# EAGLE board Z80_Video (EAGLE 5.10)
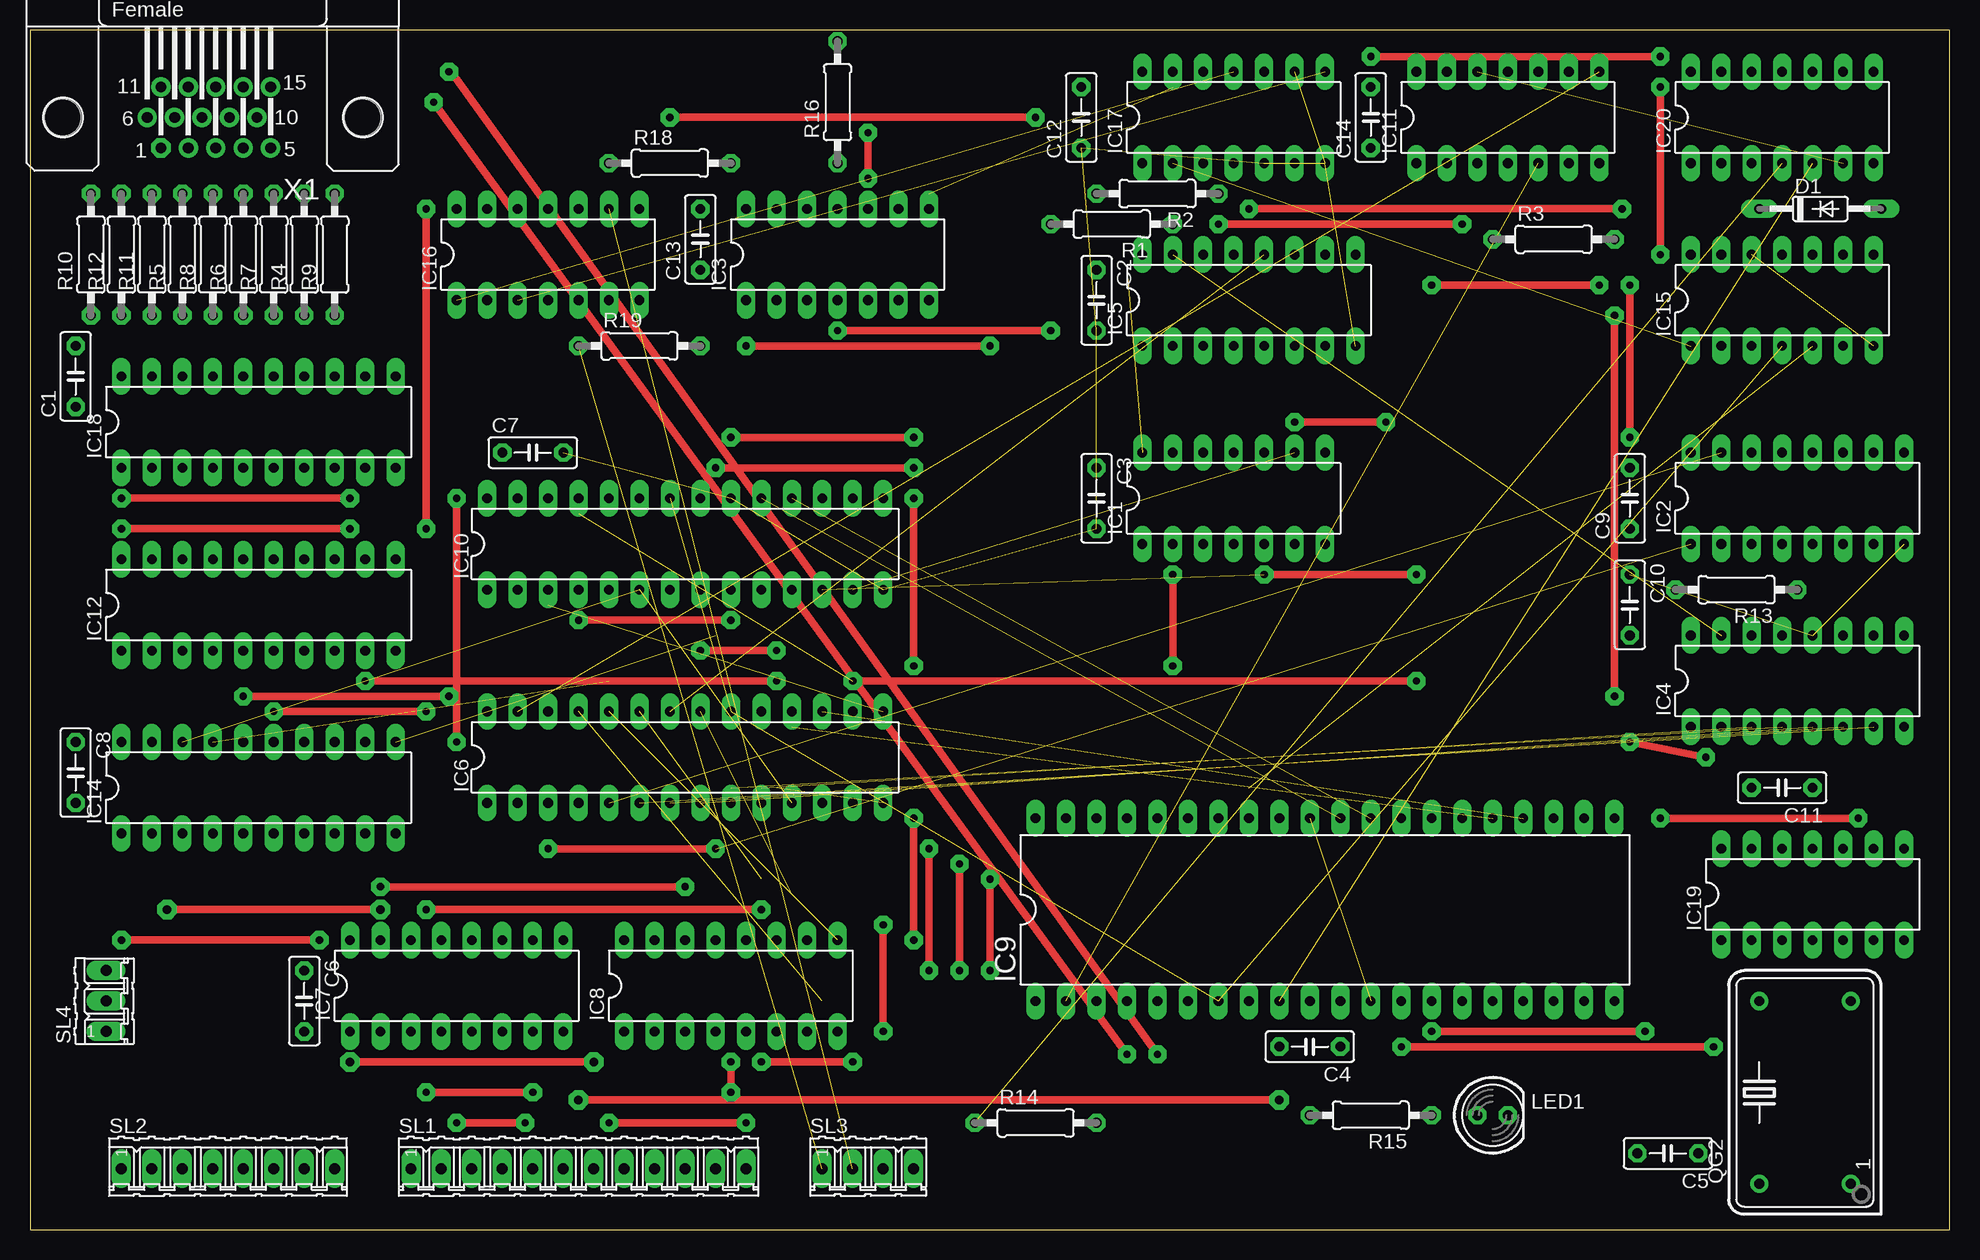
[diagram p0: board, top side]
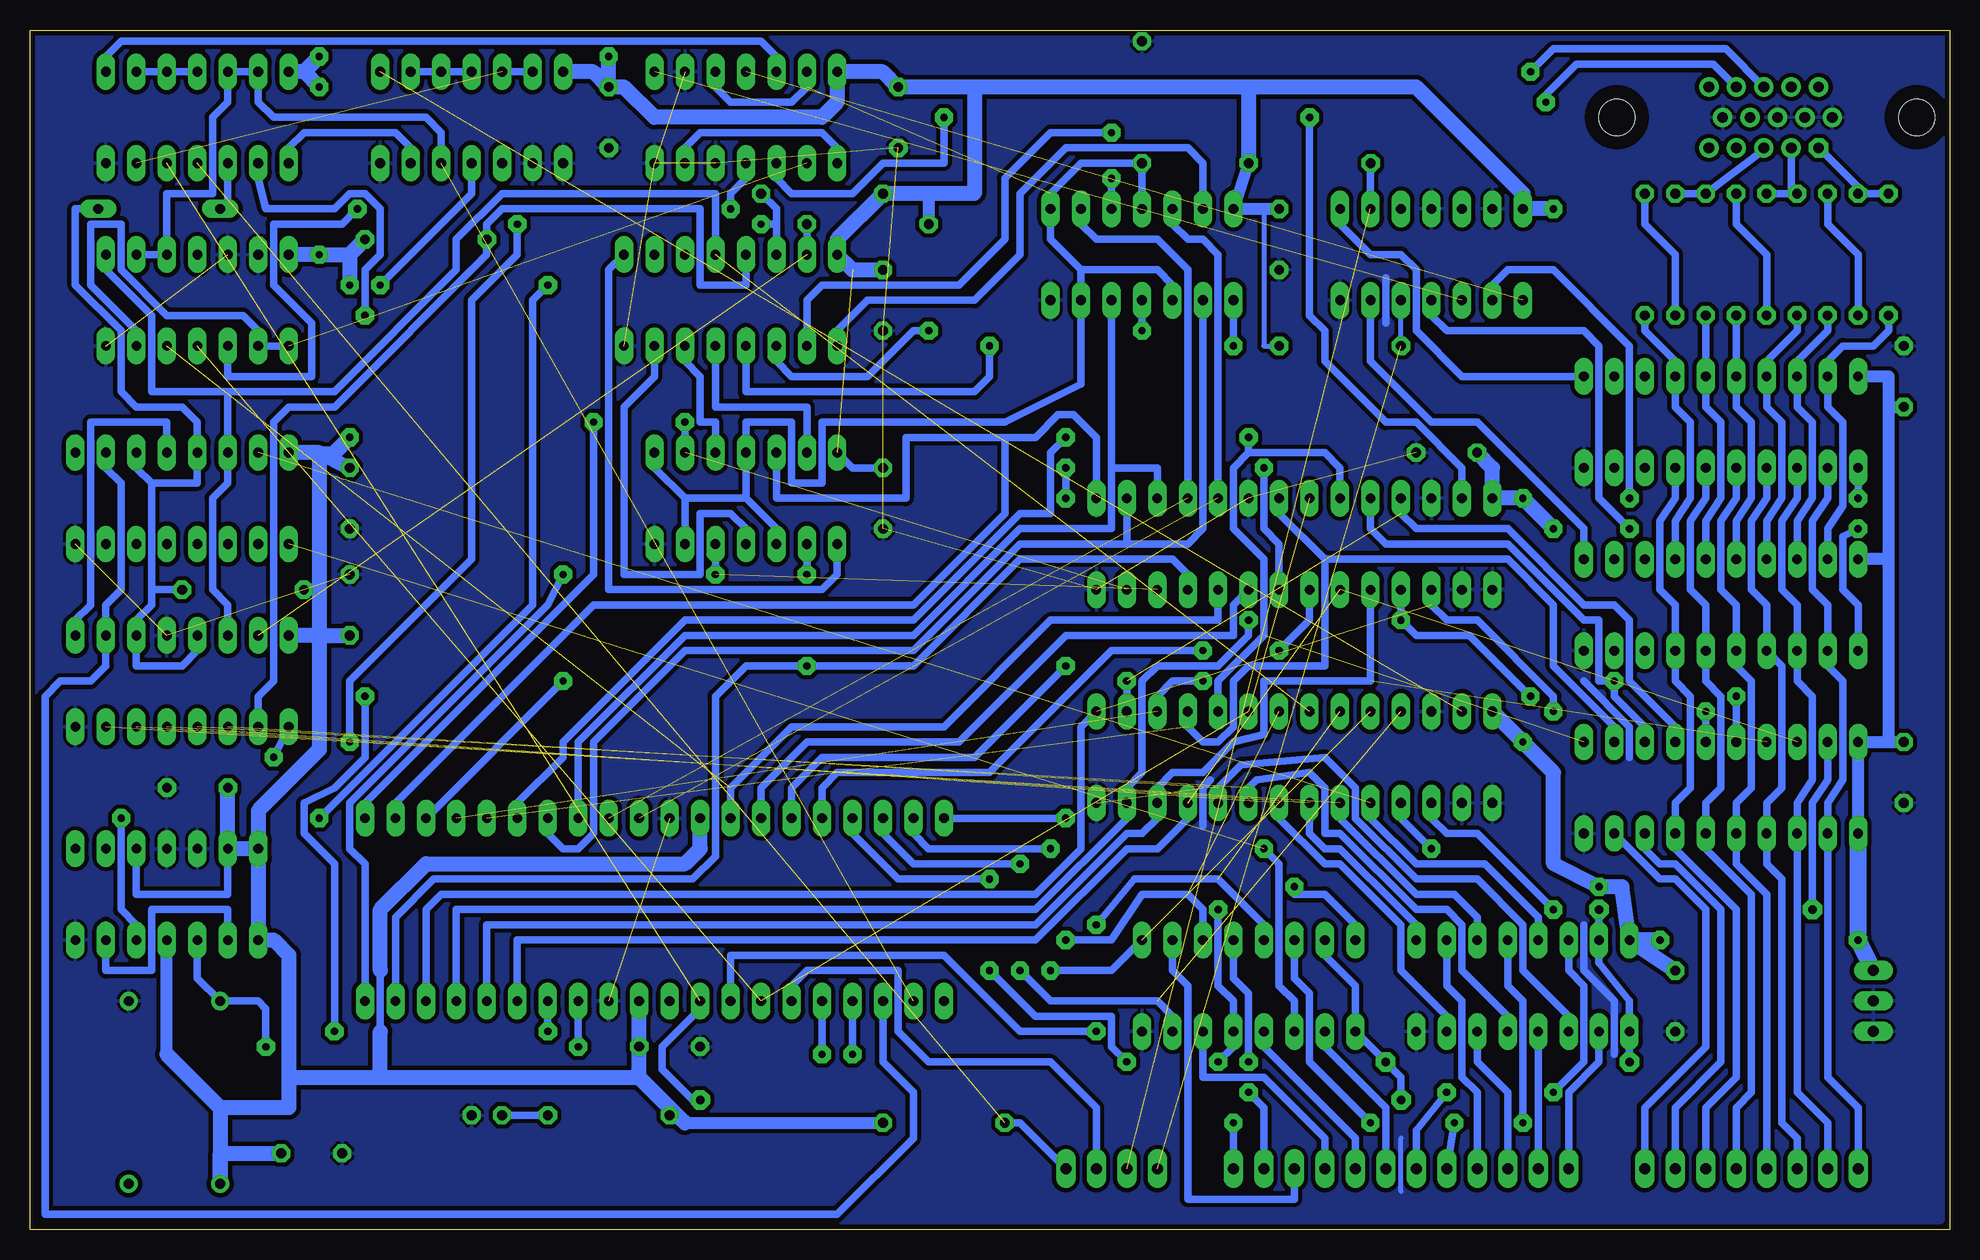
[diagram p1: board, bottom side, seen from below]

Size 160 x 100 mm. Coordinates in mm from the lower left corner, seen from the top.
Outline: 0,0 160,0 160,100 0,100 0,0
Copper layers (1*16): Top 0.035mm / dielectric 1.5mm / Bottom 0.035mm
Design rules "default *": minimum track width 10mil, minimum drill 24mil, track to track 14mil, track to pad 14mil, pad to pad 12mil, via to via 12mil, smd to smd 8mil, copper to edge 16mil, drill to drill 8mil, minimum pad ring 14mil, minimum via ring 18mil, stop-mask expansion 4mil, vias tented up to drill 0mil, thermal gap 10mil

## Footprints (pad centres in the part's own frame; a part is rotated, then mirrored left to right if it is on the bottom)
C050-025X075 = drill 0.813 octagon: 1 -2.54,0; 2 2.54,0
DO35-10 = drill 0.813 long: A 5.08,0; C -5.08,0
DIL14 = drill 0.813 long: 1 -7.62,-3.81; 2 -5.08,-3.81; 3 -2.54,-3.81; 4 0,-3.81; 5 2.54,-3.81; 6 5.08,-3.81; 7 7.62,-3.81; 8 7.62,3.81; 9 5.08,3.81; 10 2.54,3.81; 11 0,3.81; 12 -2.54,3.81; 13 -5.08,3.81; 14 -7.62,3.81
DIL16 = drill 0.813 long: 1 -8.89,-3.81; 2 -6.35,-3.81; 3 -3.81,-3.81; 4 -1.27,-3.81; 5 1.27,-3.81; 6 3.81,-3.81; 7 6.35,-3.81; 8 8.89,-3.81; 9 8.89,3.81; 10 6.35,3.81; 11 3.81,3.81; 12 1.27,3.81; 13 -1.27,3.81; 14 -3.81,3.81; 15 -6.35,3.81; 16 -8.89,3.81
DIL28-3 = drill 0.813 long: 1 -16.51,-3.81; 2 -13.97,-3.81; 3 -11.43,-3.81; 4 -8.89,-3.81; 5 -6.35,-3.81; 6 -3.81,-3.81; 7 -1.27,-3.81; 8 1.27,-3.81; 9 3.81,-3.81; 10 6.35,-3.81; 11 8.89,-3.81; 12 11.43,-3.81; 13 13.97,-3.81; 14 16.51,-3.81; 15 16.51,3.81; 16 13.97,3.81; 17 11.43,3.81; 18 8.89,3.81; 19 6.35,3.81; 20 3.81,3.81; 21 1.27,3.81; 22 -1.27,3.81; 23 -3.81,3.81; 24 -6.35,3.81; 25 -8.89,3.81; 26 -11.43,3.81; 27 -13.97,3.81; 28 -16.51,3.81
DIL40 = drill 0.813 long: 1 -24.13,-7.62; 2 -21.59,-7.62; 3 -19.05,-7.62; 4 -16.51,-7.62; 5 -13.97,-7.62; 6 -11.43,-7.62; 7 -8.89,-7.62; 8 -6.35,-7.62; 9 -3.81,-7.62; 10 -1.27,-7.62; 11 1.27,-7.62; 12 3.81,-7.62; 13 6.35,-7.62; 14 8.89,-7.62; 15 11.43,-7.62; 16 13.97,-7.62; 17 16.51,-7.62; 18 19.05,-7.62; 19 21.59,-7.62; 20 24.13,-7.62; 21 24.13,7.62; 22 21.59,7.62; 23 19.05,7.62; 24 16.51,7.62; 25 13.97,7.62; 26 11.43,7.62; 27 8.89,7.62; 28 6.35,7.62; 29 3.81,7.62; 30 1.27,7.62; 31 -1.27,7.62; 32 -3.81,7.62; 33 -6.35,7.62; 34 -8.89,7.62; 35 -11.43,7.62; 36 -13.97,7.62; 37 -16.51,7.62; 38 -19.05,7.62; 39 -21.59,7.62; 40 -24.13,7.62
DIL20 = drill 0.813 long: 1 -11.43,-3.81; 2 -8.89,-3.81; 3 -6.35,-3.81; 4 -3.81,-3.81; 5 -1.27,-3.81; 6 1.27,-3.81; 7 3.81,-3.81; 8 6.35,-3.81; 9 8.89,-3.81; 10 11.43,-3.81; 11 11.43,3.81; 12 8.89,3.81; 13 6.35,3.81; 14 3.81,3.81; 15 1.27,3.81; 16 -1.27,3.81; 17 -3.81,3.81; 18 -6.35,3.81; 19 -8.89,3.81; 20 -11.43,3.81
LED5MM = drill 0.813 octagon: A -1.27,0; K 1.27,0
DIL14S = drill 0.813 round: 1 -7.62,-3.81; 7 7.62,-3.81; 8 7.62,3.81; 14 -7.62,3.81
0207/10 = drill 0.813 octagon: 1 -5.08,0; 2 5.08,0
12P = drill 0.914 long: 1 -13.97,0; 2 -11.43,0; 3 -8.89,0; 4 -6.35,0; 5 -3.81,0; 6 -1.27,0; 7 1.27,0; 8 3.81,0; 9 6.35,0; 10 8.89,0; 11 11.43,0; 12 13.97,0
08P = drill 0.914 long: 1 -8.89,0; 2 -6.35,0; 3 -3.81,0; 4 -1.27,0; 5 1.27,0; 6 3.81,0; 7 6.35,0; 8 8.89,0
04P = drill 0.914 long: 1 -3.81,0; 2 -1.27,0; 3 1.27,0; 4 3.81,0
03P = drill 0.914 long: 1 -2.54,0; 2 0,0; 3 2.54,0
HDF15H = drill 0.9 octagon: 1 4.329,2.54 | drill 0.9 round: 2 2.043,2.54; 3 -0.243,2.54; 4 -2.529,2.54; 5 -4.815,2.54; 6 5.472,0; 7 3.186,0; 8 0.9,0; 9 -1.386,0; 10 -3.672,0; 11 4.329,-2.54; 12 2.043,-2.54; 13 -0.243,-2.54; 14 -2.529,-2.54; 15 -4.815,-2.54 | hole 3: -12.5,0; 12.5,0

## Placement (x,y rotation side)
C1  100n  [C050-025X075]  3.81,71.12 90 top
C2  100n  [C050-025X075]  88.9,77.47 270 top
C3  100n  [C050-025X075]  88.9,60.96 270 top
C4  100n  [C050-025X075]  106.68,15.24 180 top
C5  100n  [C050-025X075]  136.53,6.35 180 top
C6  100n  [C050-025X075]  22.86,19.05 270 top
C7  100n  [C050-025X075]  41.91,64.77 0 top
C8  100n  [C050-025X075]  3.81,38.1 270 top
C9  100n  [C050-025X075]  133.35,60.96 90 top
C10  100n  [C050-025X075]  133.35,52.07 270 top
C11  100n  [C050-025X075]  146.05,36.83 180 top
C12  100n  [C050-025X075]  87.63,92.71 90 top
C13  100n  [C050-025X075]  55.88,82.55 90 top
C14  100n  [C050-025X075]  111.76,92.71 90 top
D1  BAT43  [DO35-10]  149.22,85.09 0 top
IC1  74HC125N  [DIL14]  100.33,60.96 0 top
IC2  74HC590  [DIL16]  147.32,60.96 0 top
IC3  74HC125N  [DIL14]  67.31,81.28 0 top
IC4  74HC590  [DIL16]  147.32,45.72 0 top
IC5  74LS42N  [DIL16]  101.6,77.47 0 top
IC6  text ram  [DIL28-3]  54.61,39.37 0 top
IC7  74367N  [DIL16]  35.56,20.32 0 top
IC8  74367N  [DIL16]  58.42,20.32 0 top
IC9  PIC18F4455_40  [DIL40]  107.95,26.67 0 top
IC10  character ram  [DIL28-3]  54.61,57.15 0 top
IC11  74S08  [DIL14]  123.19,92.71 0 top
IC12  74HCT573N  [DIL20]  19.05,52.07 0 top
IC14  74LS245N  [DIL20]  19.05,36.83 0 top
IC15  74S00  [DIL14]  146.05,77.47 0 top
IC16  74F04N  [DIL14]  43.18,81.28 0 top
IC17  74LS86N  [DIL14]  100.33,92.71 0 top
IC18  74HCT573N  [DIL20]  19.05,67.31 0 top
IC19  74HC74  [DIL14]  148.59,27.94 0 top
IC20  7432N  [DIL14]  146.05,92.71 0 top
LED1  power  [LED5MM]  121.92,9.53 0 top
QG2  50 MHz  [DIL14S]  147.96,11.43 90 top
R1  4K7  [0207/10]  90.17,83.82 180 top
R2  4K7  [0207/10]  93.98,86.36 180 top
R3  4K7  [0207/10]  127,82.55 0 top
R4  500  [0207/10]  22.86,81.28 90 top
R5  500  [0207/10]  12.7,81.28 90 top
R6  500  [0207/10]  17.78,81.28 90 top
R7  500  [0207/10]  20.32,81.28 90 top
R8  500  [0207/10]  15.24,81.28 90 top
R9  500  [0207/10]  25.4,81.28 90 top
R10  500  [0207/10]  5.08,81.28 90 top
R11  500  [0207/10]  10.16,81.28 90 top
R12  500  [0207/10]  7.62,81.28 90 top
R13  330  [0207/10]  142.24,53.34 180 top
R14  4K7  [0207/10]  83.82,8.89 0 top
R15  560  [0207/10]  111.76,9.53 180 top
R16  680  [0207/10]  67.31,93.98 90 top
R18  4K7  [0207/10]  53.34,88.9 0 top
R19  4K7  [0207/10]  50.8,73.66 0 top
SL1  address bus  [12P]  45.72,5.08 0 top
SL2  data bus  [08P]  16.51,5.08 0 top
SL3  control bus  [04P]  69.85,5.08 0 top
SL4  power  [03P]  6.35,19.05 90 top
X1  vga  [HDF15H]  15.24,92.71 180 top

## Library data of the parts
C1-C14 = rcl
D1 = diode
IC1-IC5 IC7 IC8 IC11 IC12 IC14-IC20 = 74xx-us
IC6 IC10 = memory-hitachi
IC9 = microchip
LED1 = led
QG2 = crystal
R1-R16 R18 R19 = resistor
SL1-SL4 = con-amp-quick
X1 = con-subd

## Nets
/BG_PIXEL: IC16.2 IC18.1
/CLR_CNT: IC2.10 IC4.10 IC9.3
/EN_RAMACCESS: IC7.1 IC7.15 IC8.1 IC8.15 IC9.9 IC14.19 IC20.5
/FG_PIXEL: IC12.1 IC16.4
/H_SYNC: IC9.5 X1.13
/H_VISIBLE: IC2.14 IC4.14 IC5.12 IC6.22 IC15.8
/V_SYNC: IC9.4 X1.14
/VRAM_BUSY: IC9.6 SL3.3
/WE2: IC10.27 IC17.3
/WR_BGCOLOR: IC16.9 R18.1 SL3.2
/WR_FGCOLOR: IC16.5 R19.1 SL3.1
/WR_VRAM: IC20.4 R14.1 SL3.4
/WR_VRAM_OK: IC6.27 IC11.8
A0: IC4.3 IC6.10 IC7.3
A1: IC4.4 IC6.9 IC7.5
A2: IC4.5 IC6.8 IC7.7
A3: IC4.6 IC6.7 IC7.9
A4: IC4.7 IC6.6 IC7.11
A5: IC2.15 IC6.5 IC7.13
A6: IC2.1 IC6.4 IC8.3
A7: IC6.3 IC8.5 IC9.37
A8: IC6.25 IC8.7 IC9.38
A9: IC6.24 IC8.9 IC9.39
A10: IC6.21 IC8.11 IC9.40
A11: IC6.23 IC8.13 IC9.8
AC0: IC9.33 IC10.10 IC15.5
AC1: IC9.34 IC10.9
AC2: IC9.35 IC10.8
AC3: IC9.36 IC10.7
BG_PIXEL: IC16.1 IC17.11
CLKI: IC9.13 IC19.3 QG2.8
CNT_CLK: IC9.14 IC20.2
CPU_A0: IC7.2 SL1.1
CPU_A1: IC7.4 SL1.2
CPU_A2: IC7.6 SL1.3
CPU_A3: IC7.10 SL1.4
CPU_A4: IC7.12 SL1.5
CPU_A5: IC7.14 SL1.6
CPU_A6: IC8.2 SL1.7
CPU_A7: IC8.4 SL1.8
CPU_A8: IC8.6 SL1.9
CPU_A9: IC8.10 SL1.10
CPU_A10: IC8.12 SL1.11
CPU_A11: IC8.14 SL1.12
D0: IC12.2 IC14.2 IC18.2 SL2.1
D1: IC12.3 IC14.3 IC18.3 SL2.2
D2: IC12.4 IC14.4 IC18.4 SL2.3
D3: IC12.5 IC14.5 IC18.5 SL2.4
D4: IC12.6 IC14.6 IC18.6 SL2.5
D5: IC12.7 IC14.7 IC18.7 SL2.6
D6: IC14.8 SL2.7
D7: IC14.9 SL2.8
FG_PIXEL: IC16.3 IC17.8
GND: C1.2 C2.2 C3.2 C4.2 C5.2 C6.2 C7.2 C8.2 C9.1 C10.1 C11.1 C12.1 C13.1 C14.1 IC1.7 IC2.8 IC3.7 IC4.8 IC4.12 IC5.8 IC6.1 IC6.2 IC6.14 IC6.26 IC7.8 IC8.8 IC9.12 IC9.31 IC10.1 IC10.2 IC10.14 IC10.20 IC10.26 IC11.1 IC11.2 IC11.7 IC12.10 IC14.10 IC15.7 IC15.12 IC15.13 IC16.7 IC16.11 IC16.13 IC17.5 IC17.7 IC17.9 IC18.10 IC19.7 IC19.11 IC19.12 IC20.7 LED1.K QG2.7 R16.2 SL4.1 SL4.2 X1.6 X1.7 X1.8 X1.10
H_VISIBLE: IC9.2 IC11.5 IC15.9 IC15.10 IC20.12 IC20.13
H_VISIBLE_D1: IC20.9 IC20.10 IC20.11
H_VISIBLE_D2: IC17.12 IC20.8
I/O0: IC1.2 IC9.19 IC10.11
I/O1: IC1.5 IC9.20 IC10.12
I/O2: IC1.9 IC9.21 IC10.13
I/O3: IC1.12 IC9.22 IC10.15
I/O4: IC3.2 IC9.27 IC10.16
I/O5: IC3.5 IC9.28 IC10.17
I/O6: IC3.9 IC9.29 IC10.18
I/O7: IC3.12 IC9.30 IC10.19
N$1: R4.1 R9.2
N$2: R6.2 R8.1
N$3: R11.2 R12.1
N$4: IC15.3 IC17.4
N$5: D1.C IC20.3
N$6: LED1.A R15.1
N$7: IC11.9 IC11.10 IC11.11
N$8: IC11.12 IC11.13 IC20.6
N$14: IC19.2 IC19.6
N$15: IC17.1 IC17.6
N$16: D1.A IC2.11 IC2.13 IC4.11 IC4.13 R13.1
N$17: IC11.6 IC20.1
N$34: IC4.15 IC5.15 R1.1
N$35: IC4.1 IC5.14 R2.1
N$36: IC4.2 IC5.13 R3.1
N$39: IC2.12 IC4.9
N$58: IC15.1 IC15.2 IC15.6 IC17.2
O0: IC3.13 IC5.1
O1: IC3.10 IC5.2
O2: IC3.4 IC5.3
O3: IC3.1 IC5.4
O4: IC1.13 IC5.5
O5: IC1.10 IC5.6
O6: IC1.4 IC5.7
O7: IC1.1 IC5.9
PIXEL_CLK: IC11.4 IC19.5
PIXEL_OUT: IC1.3 IC1.6 IC1.8 IC1.11 IC3.3 IC3.6 IC3.8 IC3.11 IC17.10 IC17.13 R16.1
RC0: IC6.11 IC9.15 IC10.6 IC14.18
RC1: IC6.12 IC9.16 IC10.5 IC14.17
RC2: IC6.13 IC9.17 IC10.4 IC14.16
RC3: IC6.15 IC9.18 IC10.3 IC14.15
RC4: IC6.16 IC9.23 IC10.25 IC14.14
RC5: IC6.17 IC9.24 IC10.24 IC14.13
RC6: IC6.18 IC9.25 IC10.21 IC14.12
RC7: IC6.19 IC9.26 IC10.23 IC14.11
RGB0: IC12.19 IC18.19 R10.1
RGB1: IC12.18 IC18.18 R11.1
RGB2: IC12.17 IC18.17 R5.1
RGB3: IC12.16 IC18.16 R6.1
RGB4: IC12.15 IC18.15 R7.1
RGB5: IC12.14 IC18.14 R9.1
RGB_B: R4.2 R7.2 X1.3
RGB_G: R5.2 R8.2 X1.2
RGB_R: R10.2 R12.2 X1.1
VCC: C1.1 C2.1 C3.1 C4.1 C5.1 C6.1 C7.1 C8.1 C9.2 C10.2 C11.2 C12.2 C13.2 C14.2 IC1.14 IC2.16 IC3.14 IC4.16 IC5.16 IC6.28 IC7.16 IC8.16 IC9.11 IC9.32 IC10.28 IC11.14 IC12.20 IC14.1 IC14.20 IC15.14 IC16.14 IC17.14 IC18.20 IC19.1 IC19.4 IC19.10 IC19.13 IC19.14 IC20.14 QG2.14 R1.2 R2.2 R3.2 R13.2 R14.2 R15.2 R18.2 R19.2 SL4.3
WR_BGCOLOR: IC16.8 IC18.11
WR_CHARRAM: IC6.20 IC9.7 IC10.22 IC15.4
WR_FGCOLOR: IC12.11 IC16.6

## Tracks (layer width: path | path; a pad name or v marks a point on that pad's centre or on a via)
/BG_PIXEL  (via drill 0.6)
  Top 0.61: v7.62,60.96 v26.67,60.96
  Bottom 0.61: v7.62,60.96 IC18.1 | v26.67,60.96 26.67,73.66 33.02,80.01 36.83,80.01 38.1,78.74 IC16.2
/CLR_CNT
  Bottom 0.61: IC2.10 153.67,63.5 152.4,62.23 152.4,53.34 153.67,52.07 IC4.10 153.67,46.99 154.94,45.72 157.48,45.72 158.75,44.45 158.75,1.27 92.71,1.27 86.36,7.62 86.36,11.43 88.9,13.97 IC9.3
/EN_RAMACCESS  (via drill 0.7)  (1 unrouted)
  Top 0.61: v11.43,26.67 v29.21,26.67 | v45.72,10.79 v104.14,10.79 | v26.67,13.97 v46.99,13.97
  Bottom 0.61: IC8.15 52.07,22.86 49.53,20.32 IC8.1 v46.99,13.97 45.72,12.7 v45.72,10.79 | v29.21,26.67 IC7.15 29.21,22.23 26.67,19.05 IC7.1 v26.67,13.97 | v11.43,26.67 11.43,35.56 10.16,37.47 IC14.19 | v104.14,10.79 104.78,10.79 107.31,13.34 107.31,15.24 104.14,18.41 IC9.9
/FG_PIXEL  (via drill 0.6)
  Top 0.61: v7.62,58.42 v26.67,58.42
  Bottom 0.61: IC12.1 7.62,52.07 8.89,53.34 8.89,57.78 v7.62,58.42 | v26.67,58.42 29.21,60.96 29.21,73.66 30.48,74.93 41.91,74.93 43.18,76.2 IC16.4
/H_SYNC  (via drill 0.6)
  Top 0.61: v34.92,96.52 35.56,95.89 v93.98,14.61
  Bottom 0.61: X1.13 18.66,98.42 33.02,98.42 v34.92,96.52 | v93.98,14.61 IC9.5
/H_VISIBLE  (1 unrouted)
  Bottom 0.61: IC4.14 143.51,52.07 144.78,53.34 144.78,60.96 143.51,62.23 IC2.14 143.51,69.85 | IC15.8 153.67,80.01 149.86,76.2 149.86,69.85 143.51,69.85 | IC5.12 102.87,86.36 120.65,86.36 124.46,82.55 124.46,80.01 134.62,69.85 143.51,69.85
/V_SYNC  (via drill 0.6)
  Top 0.61: v91.44,14.61 v33.66,93.98
  Bottom 0.61: X1.14 19.67,97.16 31.11,97.16 33.66,94.61 v33.66,93.98 | v91.44,14.61 IC9.4
/VRAM_BUSY
  Bottom 0.61: IC9.6 96.52,20.32 95.25,21.59 87.63,21.59 87.63,16.51 85.09,13.97 74.93,13.97 71.12,10.16 SL3.3
/WE2  (via drill 0.6)
  Top 0.61: v53.34,92.71 v83.82,92.71
  Bottom 0.61: IC10.27 40.64,63.5 44.45,67.31 46.99,67.31 52.07,72.39 52.07,74.93 53.34,76.2 v53.34,92.71 | v83.82,92.71 83.82,88.9 88.9,88.9 91.44,86.36 96.52,86.36 97.79,87.63 IC17.3
/WR_BGCOLOR  (1 unrouted)
  Bottom 0.61: IC16.9 R18.1
/WR_FGCOLOR  (1 unrouted)
  Bottom 0.406: R19.1 IC16.5
/WR_VRAM  (1 unrouted)
  Bottom 0.61: R14.1 77.47,8.89 SL3.4
/WR_VRAM_OK  (1 unrouted)
A0  (1 unrouted)
  Bottom 0.61: IC7.3 31.75,17.78 35.56,21.59 35.56,25.4 39.37,29.21 44.45,29.21 49.53,34.29 49.53,36.83 52.07,39.37 59.05,38.73 60.96,36.83 IC6.10
A1  (1 unrouted)
  Bottom 0.61: IC7.5 36.83,17.78 40.64,21.59 40.64,25.4 41.91,26.67 44.45,26.67 50.8,33.02 52.07,33.02 52.07,36.83 53.34,38.1 57.78,37.47 58.42,36.83 IC6.9
A2  (1 unrouted)
  Bottom 0.61: IC7.7 41.91,17.78 45.72,21.59 45.72,25.4 50.8,30.48 52.07,30.48 55.88,34.29 IC6.8
A3  (1 unrouted)
  Bottom 0.61: IC7.9 44.45,25.4 45.72,26.67 50.8,31.75 52.07,31.75 53.34,33.02 IC6.7
A4  (1 unrouted)
  Bottom 0.61: IC7.11 39.37,26.04 41.27,27.94 44.45,27.94 50.8,34.29 IC6.6
A5  (1 unrouted)
  Bottom 0.61: IC7.13 34.29,26.04 38.73,30.48 44.45,30.48 48.26,34.29 IC6.5
A6  (via drill 0.6)  (1 unrouted)
  Top 0.61: v57.15,31.75 v43.18,31.75
  Bottom 0.61: IC8.3 54.61,19.05 55.88,20.32 55.88,30.48 v57.15,31.75 | v43.18,31.75 45.72,34.29 IC6.4
A7  (via drill 0.6)
  Top 0.61: v80.01,21.59 v80.01,29.21 | v60.96,13.97 v68.58,13.97 | v33.02,26.67 v60.96,26.67
  Bottom 0.61: IC9.37 91.44,33.02 87.63,29.21 v80.01,29.21 | v80.01,21.59 76.2,17.78 69.85,17.78 69.85,15.24 v68.58,13.97 | v60.96,13.97 59.69,15.24 IC8.5 59.69,19.05 60.96,20.32 v60.96,26.67 | v33.02,26.67 39.37,33.02 41.91,33.02 43.18,34.29 IC6.3
A8  (via drill 0.6)  (1 unrouted)
  Top 0.61: v77.47,21.59 v77.47,30.48
  Bottom 0.61: IC8.7 64.77,17.78 66.04,19.05 74.93,19.05 v77.47,21.59 | v77.47,30.48 86.36,30.48 88.9,33.02 IC9.38
A9  (via drill 0.6)  (1 unrouted)
  Top 0.61: v74.93,21.59 v74.93,31.75
  Bottom 0.61: IC9.39 86.36,33.02 85.09,31.75 v74.93,31.75 | v74.93,21.59 69.85,21.59 IC8.9
A10  (via drill 0.6)  (1 unrouted)
  Top 0.61: v73.66,24.13 v73.66,34.29
  Bottom 0.61: v73.66,34.29 IC9.40 | v73.66,24.13 69.85,24.13 67.31,27.94 63.5,27.94 62.23,26.67 IC8.11
A11  (via drill 0.6)  (1 unrouted)
  Top 0.61: v71.12,25.4 v71.12,16.51
  Bottom 0.61: IC8.13 57.15,25.4 60.96,29.21 67.94,29.21 v71.12,25.4 | v71.12,16.51 77.47,16.51 83.82,22.86 101.6,22.86 IC9.8
AC0  (1 unrouted)
  Bottom 0.61: IC10.10 60.96,50.8 74.93,50.8 83.82,41.91 96.52,41.91 101.6,36.83 IC9.33
AC1
  Bottom 0.61: IC10.9 59.69,52.07 59.69,49.53 73.66,49.53 82.55,40.64 95.25,40.64 99.06,36.83 IC9.34
AC2  (via drill 0.6)
  Top 0.61: v57.15,63.5 v73.66,63.5 | v73.66,60.96 v73.66,46.99
  Bottom 0.61: IC10.8 55.88,57.15 57.15,58.42 v57.15,63.5 | v73.66,63.5 v73.66,60.96 | v73.66,46.99 81.28,39.37 93.98,39.37 96.52,36.83 IC9.35
AC3  (via drill 0.6)
  Top 0.61: v55.88,48.26 v62.23,48.26
  Bottom 0.61: IC10.7 53.34,50.8 v55.88,48.26 | v62.23,48.26 69.85,48.26 80.01,38.1 92.71,38.1 93.98,36.83 IC9.36
BG_PIXEL  (1 unrouted)
CLKI  (via drill 0.6)
  Top 0.61: v114.3,15.24 v140.34,15.24
  Bottom 0.61: 146.05,22.86 IC19.3 146.05,20.95 QG2.8 140.97,19.05 140.34,18.41 v140.34,15.24 | v114.3,15.24 IC9.13
CNT_CLK  (via drill 0.6)
  Top 0.61: v132.08,44.45 v132.08,76.2 | v116.84,16.51 v134.62,16.51
  Bottom 0.61: IC20.2 140.97,87.63 140.34,85.09 134.62,85.09 133.35,86.36 132.08,86.36 130.81,85.09 130.81,81.28 132.08,80.01 v132.08,76.2 | v132.08,44.45 132.08,39.37 134.62,36.83 137.16,35.56 137.16,33.02 134.62,30.48 v134.62,16.51 | v116.84,16.51 IC9.14
CPU_A0
  Bottom 0.61: SL1.1 31.75,11.43 29.21,13.97 IC7.2
CPU_A1
  Bottom 0.61: SL1.2 IC7.4
CPU_A2
  Bottom 0.61: SL1.3 36.83,11.43 39.37,13.97 IC7.6
CPU_A3
  Bottom 0.61: SL1.4 39.37,11.43 40.64,12.7 40.64,19.05 41.91,20.32 IC7.10
CPU_A4  (via drill 0.6)
  Top 0.61: v35.56,8.89 v41.27,8.89
  Bottom 0.61: v35.56,8.89 35.56,19.05 36.83,20.32 IC7.12 | v41.27,8.89 SL1.5
CPU_A5  (via drill 0.6)
  Top 0.61: v33.02,11.43 v41.91,11.43
  Bottom 0.61: SL1.6 44.45,8.26 v41.91,11.43 | v33.02,11.43 30.48,13.97 30.48,20.32 31.75,21.59 IC7.14
CPU_A6
  Bottom 0.61: IC8.2 52.07,15.24 46.99,10.16 SL1.7
CPU_A7
  Bottom 0.61: SL1.8 49.53,7.62 54.61,12.7 55.88,13.97 57.15,15.24 IC8.4
CPU_A8
  Bottom 0.61: SL1.9 52.07,7.62 57.15,12.7 62.23,12.7 IC8.6
CPU_A9
  Bottom 0.61: SL1.10 54.61,2.54 63.5,2.54 63.5,20.32 64.77,21.59 IC8.10
CPU_A10  (via drill 0.6)
  Top 0.61: v58.42,11.43 v58.42,13.97
  Bottom 0.61: IC8.12 59.69,20.95 58.42,19.68 v58.42,13.97 | SL1.11 57.15,10.16 v58.42,11.43
CPU_A11  (via drill 0.6)
  Top 0.61: v48.26,8.89 v59.69,8.89
  Bottom 0.61: IC8.14 54.61,20.95 53.34,19.68 53.34,13.97 v48.26,8.89 | v59.69,8.89 SL1.12
D0
  Bottom 0.61: IC18.2 10.16,60.96 11.43,59.05 11.43,53.34 10.16,52.07 IC12.2 10.16,46.99 8.89,45.72 8.89,37.47 10.16,35.56 IC14.2 10.16,12.7 7.62,10.16 SL2.1
D1
  Bottom 0.61: IC18.3 12.7,60.96 13.97,59.05 13.97,53.34 12.7,52.07 IC12.3 12.7,45.72 11.43,44.45 11.43,37.47 12.7,35.56 IC14.3 12.7,11.43 10.16,8.89 SL2.2
D2
  Bottom 0.61: IC18.4 15.24,60.96 16.51,59.05 16.51,53.34 15.24,52.07 IC12.4 13.97,46.99 13.97,36.83 15.24,35.56 IC14.4 15.24,30.48 13.97,29.21 13.97,8.89 12.7,7.62 SL2.3
D3
  Bottom 0.61: IC18.5 17.78,60.96 19.05,59.05 19.05,53.34 17.78,52.07 IC12.5 17.78,46.99 16.51,45.72 16.51,36.83 17.78,35.56 IC14.5 17.78,30.48 15.24,27.94 SL2.4
D4
  Bottom 0.61: IC18.6 20.32,60.96 21.59,59.05 21.59,53.34 20.32,52.07 IC12.6 20.32,45.72 19.05,44.45 19.05,36.83 20.32,35.56 IC14.6 20.32,31.75 16.51,27.94 16.51,11.43 17.78,10.16 SL2.5
D5
  Bottom 0.61: IC18.7 22.86,60.96 24.13,59.05 24.13,53.34 22.86,52.07 IC12.7 22.86,45.72 21.59,44.45 21.59,36.83 22.86,35.56 IC14.7 22.86,31.75 17.78,26.67 17.78,12.7 20.32,10.16 SL2.6
D6
  Bottom 0.61: IC14.8 25.4,31.75 24.13,30.48 22.86,30.48 19.05,26.67 19.05,13.97 22.86,10.16 SL2.7
D7
  Bottom 0.61: SL2.8 25.4,10.16 20.32,15.24 20.32,26.67 22.86,29.21 24.13,29.21 IC14.9
FG_PIXEL  (1 unrouted)
GND  (14 unrouted)
  Bottom 0.406: 45.72,3.17 45.72,7.62
  Bottom 0.61: 62.23,33.66 62.23,36.83 61.59,37.47 | 26.67,39.37 26.67,41.91 30.48,45.72 | 46.99,75.56 46.99,79.38 | 30.48,25.4 30.48,21.59 27.94,19.05 27.94,14.61
  pour Bottom: 0,1.27 0,100.33 160.02,100.33 160.02,0 1.27,0
H_VISIBLE  (1 unrouted)
  Bottom 0.61: IC15.9 IC15.10 148.59,86.36 144.78,86.36 144.78,92.71 143.51,93.98 IC20.12 IC20.13 140.97,93.98 139.7,92.71 127,92.71 125.73,91.44 IC11.5
H_VISIBLE_D1
  Bottom 0.61: IC20.11 IC20.10 IC20.9
H_VISIBLE_D2
  Bottom 0.61: IC20.8 153.67,97.79 152.4,99.06 99.06,99.06 97.79,97.79 IC17.12
I/O0  (via drill 0.6)
  Top 0.61: v95.25,46.99 v95.25,54.61
  Bottom 0.61: IC10.11 63.5,54.61 64.77,55.88 77.47,55.88 86.36,46.99 v95.25,46.99 100.33,46.99 102.87,44.45 102.87,31.11 104.78,29.21 126.36,29.21 129.54,26.04 IC9.19 | v95.25,54.61 IC1.2
I/O1  (via drill 0.6)  (1 unrouted)
  Top 0.61: v115.57,54.61 v102.87,54.61
  Bottom 0.61: IC9.20 132.08,30.48 133.35,31.75 133.35,35.56 116.84,52.07 v115.57,54.61 | v102.87,54.61 IC1.5
I/O2  (via drill 0.6)  (1 unrouted)
  Top 0.61: v113.03,67.31 v105.41,67.31
  Bottom 0.61: IC9.21 132.08,35.56 113.03,54.61 v113.03,67.31 | v105.41,67.31 IC1.9
I/O3
  Bottom 0.61: 71.12,59.69 IC10.15 71.12,66.04 73.03,67.94 74.3,67.94 76.2,66.04 78.74,66.04 | 78.74,66.04 87,66.04 87,60.96 97.79,60.96 IC1.12 | IC9.22 129.54,35.56 113.03,52.07 86.36,52.07 78.74,59.69 78.74,66.04
I/O4
  Bottom 0.61: IC3.2 62.23,58.42 63.5,57.15 68.58,57.15 | IC10.16 68.58,58.42 68.58,57.15 | 68.58,57.15 77.47,57.15 86.36,48.26 105.41,48.26 113.03,40.64 113.03,33.02 114.3,31.75 115.57,31.75 116.84,33.02 IC9.27
I/O5
  Bottom 0.61: 69.85,63.5 IC3.5 | IC10.17 66.04,63.5 69.85,63.5 | 69.85,63.5 69.85,58.42 77.47,58.42 86.36,49.53 105.41,49.53 114.3,40.64 IC9.28
I/O6  (1 unrouted)
  Bottom 0.61: IC10.18 63.5,80.01 66.04,82.55 71.12,82.55 72.39,83.82 IC3.9
I/O7  (1 unrouted)
  Bottom 0.61: IC10.19 60.96,81.28 62.23,82.55 63.5,82.55 64.77,83.82 IC3.12
N$1
  Bottom 0.61: R9.2 25.4,83.82 22.86,81.28 R4.1
N$2
  Bottom 0.61: R8.1 15.24,81.28 17.78,83.82 R6.2
N$3
  Bottom 0.61: R11.2 10.16,83.82 7.62,81.28 R12.1
N$4  (via drill 0.6)
  Top 0.61: v101.6,85.09 v132.72,85.09
  Bottom 0.61: v101.6,85.09 101.6,86.36 100.33,87.63 IC17.4 | v132.72,85.09 133.99,83.82 139.7,83.82 139.7,78.74 136.53,75.56 136.53,71.12 143.51,71.12 IC15.3
N$5
  Bottom 0.61: D1.C 143.51,85.72 IC20.3
N$6
  Bottom 0.61: R15.1 LED1.A
N$7
  Bottom 0.61: IC11.11 IC11.10 IC11.9
N$8  (1 unrouted)
  Bottom 0.61: IC11.13 IC11.12
N$14
  Bottom 0.61: IC19.2 143.51,26.67 149.86,26.67 149.86,21.59 153.67,21.59 IC19.6 153.67,25.4
N$15
  Bottom 0.61: IC17.1 92.71,90.17 93.98,91.44 104.14,91.44 105.41,90.17 IC17.6
N$16
  Bottom 0.61: IC4.13 146.05,48.26 147.32,46.99 151.13,46.99 IC4.11 151.13,50.8 149.86,52.07 149.86,53.34 | 149.86,53.34 149.86,62.23 | 149.86,62.23 151.13,63.5 IC2.11 | 149.86,62.23 146.05,62.23 IC2.13 146.05,67.31 147.32,68.58 151.13,68.58 152.4,69.85 152.4,74.93 156.21,78.74 156.21,85.09 D1.A | 149.86,53.34 R13.1
N$17
  Bottom 0.61: IC11.6 128.27,90.17 129.54,91.44 137.16,91.44 138.43,90.17 IC20.1
N$34  (1 unrouted)
  Bottom 0.61: IC5.15 R1.1
N$35  (via drill 0.6)
  Top 0.61: v119.38,83.82 v99.06,83.82 | v133.35,40.64 v139.7,39.37
  Bottom 0.61: 97.79,83.82 97.79,85.09 R2.1 | 97.79,83.82 IC5.14 | v99.06,83.82 97.79,83.82 | v119.38,83.82 119.38,81.28 123.19,77.47 123.19,55.88 133.35,45.72 v133.35,40.64 | v139.7,39.37 IC4.1
N$36
  Bottom 0.61: IC4.2 140.97,44.45 139.7,45.72 139.7,67.31 138.43,68.58 134.62,68.58 121.92,81.28 R3.1 121.92,83.82 120.65,85.09 104.14,85.09 104.14,78.74 100.33,78.74 IC5.13
N$39
  Bottom 0.61: IC4.9 156.21,50.8 154.94,52.07 154.94,67.31 148.59,67.31 IC2.12
N$58  (1 unrouted)
  Bottom 0.61: IC15.1 IC15.2 140.97,74.93 142.24,76.2 148.59,76.2 152.4,80.01 152.4,83.82 154.94,83.82 154.94,78.74 151.13,74.93 IC15.6
O0
  Bottom 0.61: IC5.1 92.71,74.93 90.17,77.47 81.28,77.47 77.47,81.28 77.47,86.36 73.66,90.17 63.5,90.17 62.23,88.9 IC3.13
O1  (via drill 0.6)
  Top 0.61: v69.85,87.63 v69.85,91.44
  Bottom 0.61: IC5.2 95.25,77.47 93.98,78.74 82.55,78.74 78.74,82.55 78.74,87.63 74.93,91.44 v69.85,91.44 | IC3.10 v69.85,87.63
O2  (via drill 0.6)
  Top 0.61: v67.31,74.93 v85.09,74.93
  Bottom 0.61: v67.31,74.93 IC3.4 | v85.09,74.93 86.36,74.93 90.17,71.12 96.52,71.12 97.79,72.39 IC5.3
O3  (via drill 0.6)
  Top 0.61: v59.69,73.66 v80.01,73.66
  Bottom 0.61: 100.33,74.93 IC5.4 100.33,69.85 81.28,69.85 80.01,71.12 v80.01,73.66 | v59.69,73.66 IC3.1
O4
  Bottom 0.61: IC1.13 95.25,68.58 102.87,68.58 IC5.5
O5
  Bottom 0.61: IC1.10 102.87,67.31 104.14,67.31 104.14,71.12 105.41,72.39 IC5.6
O6
  Bottom 0.61: IC1.4 100.33,58.42 101.6,59.69 104.14,59.69 104.14,54.61 110.49,54.61 110.49,68.58 107.95,71.12 IC5.7
O7
  Bottom 0.61: IC1.1 92.71,54.61 93.98,53.34 111.76,53.34 111.76,80.01 IC5.9
PIXEL_CLK  (via drill 0.6)
  Top 0.61: v116.84,78.74 v130.81,78.74 | v135.89,34.29 v152.4,34.29
  Bottom 0.61: v130.81,78.74 123.19,86.36 IC11.4 | v116.84,78.74 118.11,77.47 118.11,52.07 v135.89,34.29 | v152.4,34.29 152.4,26.67 151.13,25.4 IC19.5
PIXEL_OUT  (1 unrouted)
  Bottom 0.61: IC3.3 64.77,78.74 66.04,80.01 72.39,80.01 | 72.39,80.01 IC3.6 | IC3.6 72.39,78.74 | 72.39,80.01 74.93,82.55 IC3.8 74.93,86.36 72.39,88.9 R16.1 IC3.11 | IC1.3 97.79,58.42 100.33,60.96 | 100.33,60.96 105.41,60.96 | 105.41,60.96 IC1.6 | 105.41,60.96 107.95,63.5 IC1.8 | IC3.6 72.39,70.48 78.74,67.31 93.98,67.31 93.98,62.23 96.52,62.23 96.52,67.31 100.33,67.31 IC1.11 100.33,60.96 | IC17.13 95.25,95.25 96.52,93.98 101.6,93.98 102.87,95.25 IC17.10
RC0  (2 unrouted)
  Bottom 0.61: IC6.11 63.5,34.29 66.04,31.75 68.58,31.75 76.2,24.13 119.38,24.13 IC9.15
RC1  (1 unrouted)
  Bottom 0.61: IC9.16 121.92,25.4 76.2,25.4 68.58,33.02 67.31,33.02 66.04,34.29 IC6.12 66.04,36.83 64.77,38.1 62.23,38.1 59.69,40.64 57.15,41.27 57.15,45.72 48.26,45.72 IC10.5
RC2  (via drill 0.6)
  Top 0.61: v17.78,44.45 v34.92,44.45 | v45.72,50.8 v58.42,50.8
  Bottom 0.61: IC9.17 124.46,26.67 76.2,26.67 68.58,34.29 IC6.13 68.58,36.83 67.31,38.1 67.31,45.72 66.04,46.99 60.96,46.99 58.42,49.53 v58.42,50.8 | IC14.16 v17.78,44.45 | v34.92,44.45 40.01,49.53 44.45,49.53 v45.72,50.8 IC10.4
RC3  (via drill 0.6)  (1 unrouted)
  Top 0.61: v20.32,43.18 v33.02,43.18
  Bottom 0.61: IC9.18 127,26.67 125.73,27.94 76.2,27.94 72.39,31.75 72.39,41.91 IC6.15 | IC14.15 v20.32,43.18 | v33.02,43.18 33.02,44.45 39.37,50.8 41.91,50.8 43.18,52.07 IC10.3
RC4  (via drill 0.6)  (1 unrouted)
  Top 0.61: v68.58,45.72 v115.57,45.72
  Bottom 0.61: IC14.14 22.86,41.91 26.67,45.72 26.67,50.8 27.94,52.07 30.48,52.07 36.83,58.42 44.45,58.42 45.72,59.69 IC10.25 | v115.57,45.72 IC9.23 | IC6.16 v68.58,45.72
RC5  (via drill 0.6)  (1 unrouted)
  Top 0.61: v27.94,45.72 v62.23,45.72
  Bottom 0.61: IC14.13 25.4,41.91 27.94,44.45 v27.94,45.72 29.21,45.72 29.21,50.8 30.48,50.8 36.83,57.15 46.99,57.15 48.26,58.42 IC10.24 | IC6.17 66.04,44.45 64.77,45.72 v62.23,45.72
RC6  (1 unrouted)
  Bottom 0.61: IC14.12 27.94,41.91 33.02,46.99 33.02,52.07 36.83,55.88 52.07,55.88 | 52.07,55.88 55.88,59.69 IC10.21 | IC6.18 63.5,41.91 62.23,40.64 60.96,40.64 59.69,41.91 59.69,45.72 58.42,46.99 52.07,46.99 52.07,55.88
RC7  (via drill 0.6)  (1 unrouted)
  Top 0.61: v58.42,66.04 v73.66,66.04
  Bottom 0.61: IC6.19 60.96,45.72 57.15,49.53 57.15,55.88 59.69,58.42 59.69,63.5 58.42,64.77 | 58.42,64.77 52.07,64.77 50.8,63.5 IC10.23 | IC9.26 119.38,35.56 115.57,39.37 115.57,40.64 105.41,50.8 86.36,50.8 77.47,59.69 74.93,59.69 74.93,64.77 v73.66,66.04 | 58.42,64.77 v58.42,66.04
RGB0
  Bottom 0.61: R10.1 5.08,74.93 6.35,73.66 8.89,73.66 10.16,72.39 IC18.19 10.16,68.58 8.89,67.31 8.89,60.33 10.16,58.42 IC12.19
RGB1
  Bottom 0.61: R11.1 10.16,74.93 12.7,72.39 IC18.18 12.7,68.58 11.43,67.31 11.43,60.96 12.7,59.05 IC12.18
RGB2
  Bottom 0.61: R5.1 12.7,74.93 15.24,72.39 IC18.17 15.24,68.58 13.97,67.31 13.97,60.96 15.24,59.05 IC12.17
RGB3
  Bottom 0.61: R6.1 IC18.16 17.78,68.58 16.51,67.31 16.51,60.96 17.78,59.05 IC12.16
RGB4
  Bottom 0.61: R7.1 IC18.15 20.32,68.58 19.05,67.31 19.05,60.96 20.32,59.05 IC12.15
RGB5
  Bottom 0.61: R9.1 25.4,74.93 22.86,72.39 IC18.14 22.86,68.58 21.59,67.31 21.59,60.96 22.86,59.05 IC12.14
RGB_B
  Bottom 0.61: R4.2 R7.2 15.24,90.17 X1.3
RGB_G
  Bottom 0.61: X1.2 13.2,86.86 R5.2 R8.2
RGB_R
  Bottom 0.61: R10.2 R12.2 7.62,86.88 X1.1
VCC  (via drill 0.6)  (1 unrouted)
  Top 0.61: v7.62,24.13 v24.13,24.13 | v29.21,28.57 v54.61,28.57 | v35.56,40.64 v35.56,60.96 | v33.02,58.42 v33.02,85.09 | v111.76,97.79 v135.89,97.79 | v135.89,95.25 v135.89,81.28 | v133.35,78.74 v133.35,66.04
  Bottom 0.406: R19.2 57.15,73.66 57.15,85.09 | R15.2 106.05,9.53 105.73,9.21
  Bottom 0.61: v54.61,28.57 54.61,27.94 52.07,27.94 49.53,25.4 IC8.16 | IC19.10 151.13,27.94 143.51,27.94 IC19.13 | IC3.14 59.69,86.36 | C3.1 91.44,63.5 IC1.14 | 130.81,16.51 130.81,21.59
  Bottom 1.016: IC14.1 IC14.20 5.08,40.64 | 5.08,40.64 C8.1 | 5.08,40.64 5.08,55.88 | 5.08,55.88 IC12.20 | 5.08,55.88 5.08,68.58 | 5.08,68.58 5.08,71.12 IC18.20 | 148.59,14.61 IC19.4 | IC6.28 v35.56,40.64 | C13.2 57.15,85.09 IC3.14 R18.2 | 134.62,64.77 135.89,64.77 | 135.89,53.34 R13.2 | 85.09,86.36 R1.2 | 105.41,8.89 R14.2 | 5.08,68.58 C1.1
  Bottom 1.27: IC7.16 C6.1 | IC7.16 27.3,28.57 v29.21,28.57 33.02,30.48 33.02,38.1 IC6.28 | 144.15,10.16 QG2.14 144.15,6.35 C5.1 | 144.15,10.16 148.59,14.61 | 138.43,12.7 138.43,10.16 144.15,10.16 | 138.43,12.7 138.43,22.86 139.7,24.13 IC19.1 IC19.14 | IC19.14 IC19.13 C11.2 | C2.1 91.44,80.01 IC5.16 92.71,82.55 R2.2 85.09,86.36 81.28,86.36 81.28,95.25 | 135.89,49.53 IC4.16 | 135.89,64.77 IC2.16 | 135.89,64.77 C9.2 | IC11.14 113.03,96.52 C14.2 | 58.42,95.25 44.45,95.25 35.56,86.36 IC16.14 v33.02,85.09 | 58.42,95.25 R18.2 | 58.42,95.25 81.28,95.25 | 81.28,95.25 C12.2 88.9,96.52 IC17.14 92.71,93.98 93.98,92.71 107.95,92.71 110.49,95.25 C14.2 | IC19.14 140.97,34.92 135.89,40.01 135.89,49.53 | 135.89,64.77 135.89,53.34 135.89,49.53 | 135.89,49.53 C10.2 | 138.43,12.7 130.81,12.7 | IC9.11 C4.1 109.22,12.7 | 130.81,12.7 109.22,12.7 | v33.02,58.42 v35.56,60.96 IC10.28 38.1,63.5 C7.1 | v135.89,97.79 137.16,96.52 | C14.2 v111.76,97.79 | 137.16,96.52 IC20.14 | 137.16,96.52 v135.89,95.25 | 133.35,81.28 v135.89,81.28 IC15.14 | 133.35,81.28 R3.2 | 133.35,81.28 v133.35,78.74 | v133.35,66.04 134.62,64.77 | 109.22,12.7 105.73,9.21 105.41,8.89 | v24.13,24.13 IC7.16 | 130.81,12.7 130.81,16.51 | 130.81,21.59 130.81,26.67 127,30.48 105.41,30.48 104.14,31.75 IC9.32
  Bottom 1.422: IC14.1 v7.62,24.13 SL4.3
WR_BGCOLOR
  Bottom 0.61: IC18.11 40.64,71.12 44.45,74.93 44.45,80.01 45.72,81.28 48.26,81.28 50.8,83.82 IC16.8
WR_CHARRAM  (3 unrouted)
WR_FGCOLOR
  Bottom 0.61: IC12.11 30.48,58.42 39.37,67.31 43.18,67.31 48.26,72.39 IC16.6